# EAGLE board delayed_pulser (EAGLE 6.5.0)
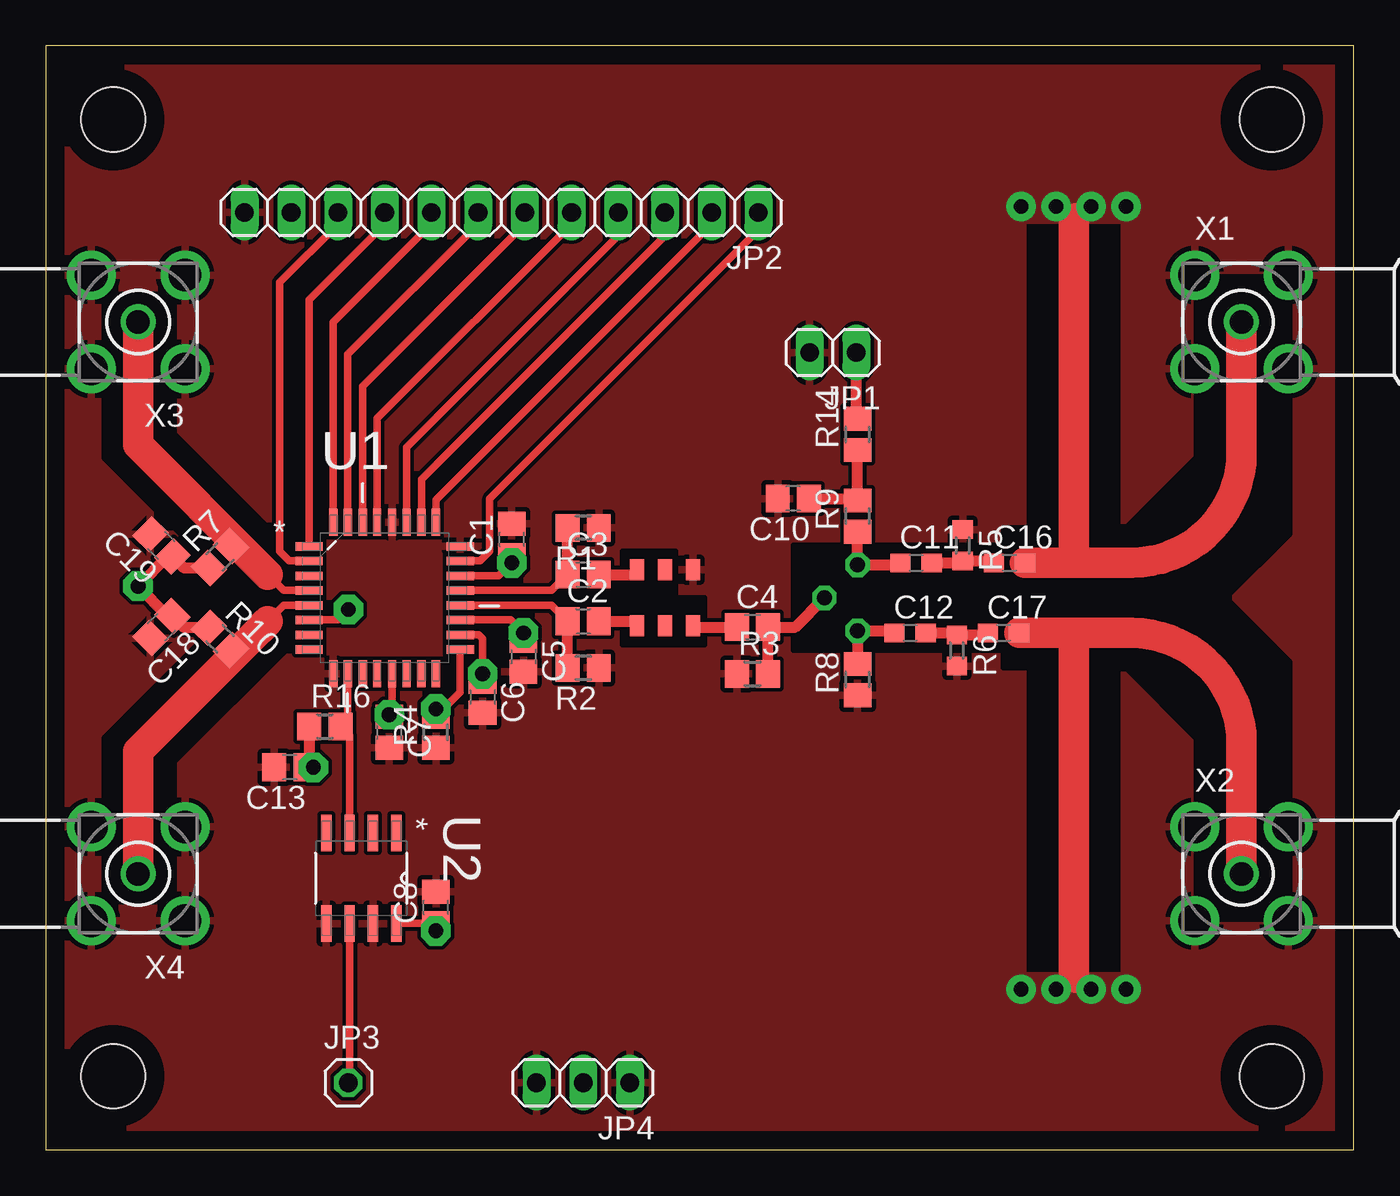
[diagram p0: board, top side]
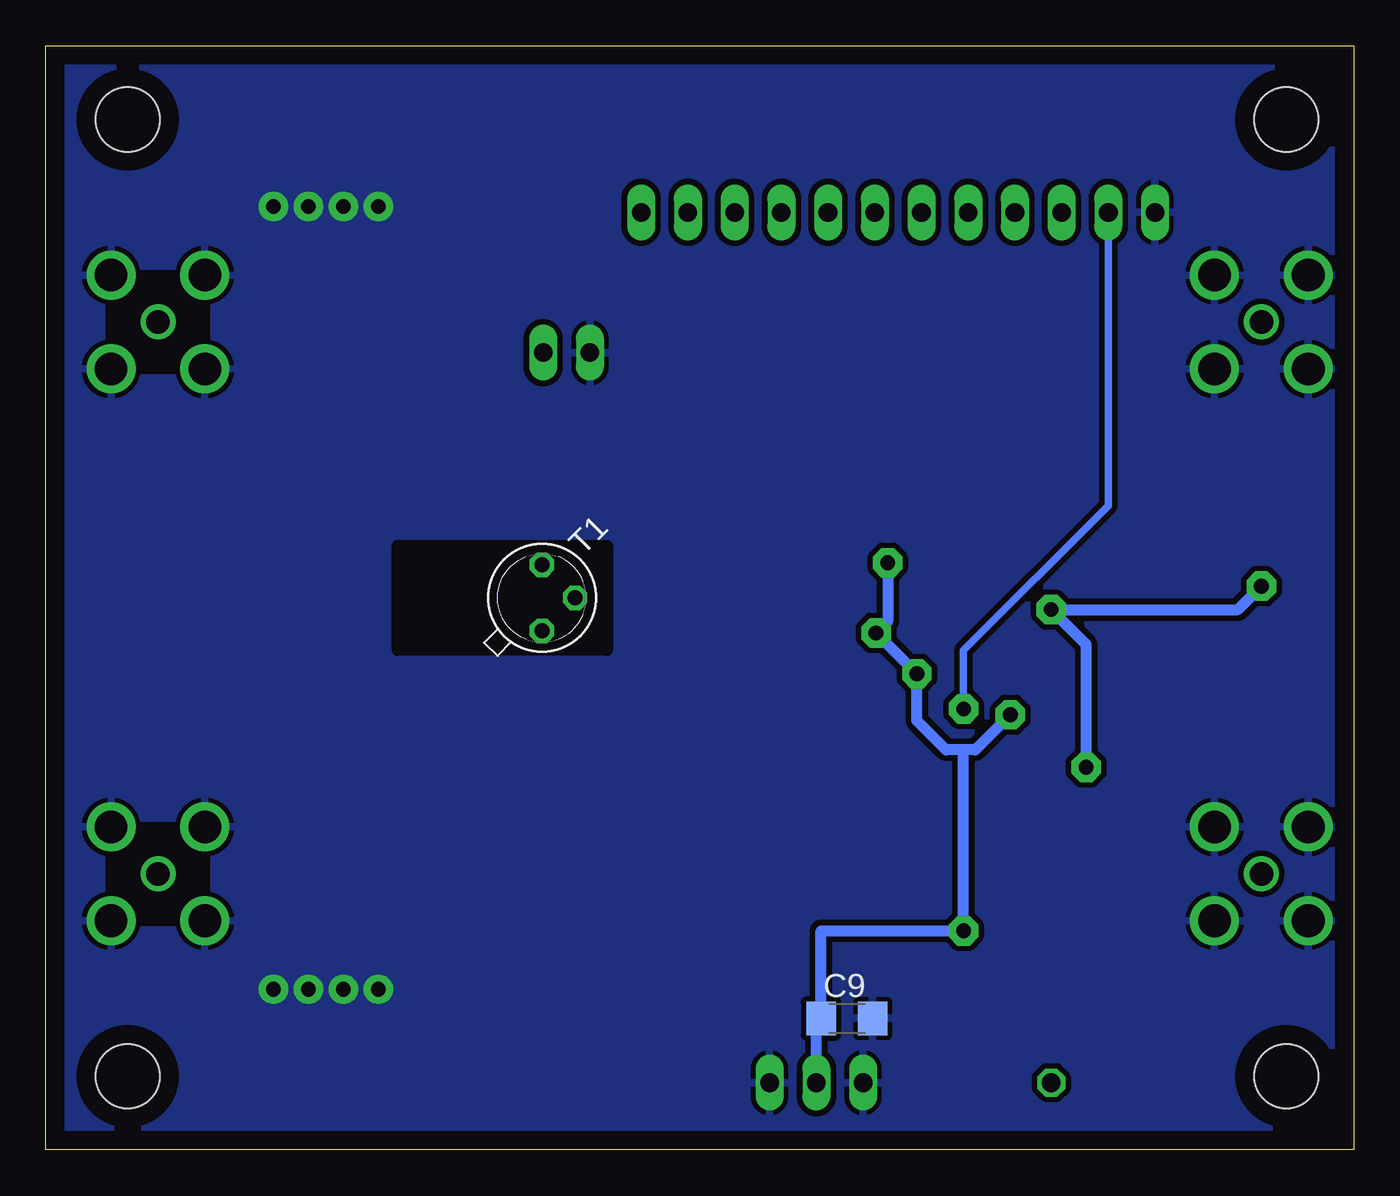
[diagram p1: board, bottom side, seen from below]

Size 71.1 x 60 mm. Coordinates in mm from the lower left corner, seen from the top.
Outline: 0,0 71.1,0 71.1,60 0,60 0,0
Copper layers (1*16): Top 0.035mm / dielectric 1.5mm / Bottom 0.035mm
Design rules "default": minimum track width 10mil, minimum drill 24mil, track to track 8mil, track to pad 8mil, pad to pad 8mil, via to via 8mil, smd to smd 8mil, copper to edge 40mil, drill to drill 8mil, minimum pad ring 10mil, minimum via ring 8mil, stop-mask expansion 4mil, vias tented up to drill 0mil, thermal gap 10mil
Holes 3.5 mm at 3.66,56 66.66,56 66.66,4 3.66,4
tRestrict: area 62.5,42.5 to 67.6,47.5; area 62.5,12.5 to 67.6,17.5; area 3.2,13.5 to 13.3,46.5; area 52.1,12.5 to 67.6,47.5; area 40.6,27.1 to 52.1,32.9; area 53.3,9.7 to 58.4,27.1; area 53.3,32.9 to 58.4,50.3; area 31.4,27.5 to 35.8,32.5
bRestrict: area 62.5,42.5 to 67.6,47.5; area 62.5,12.5 to 67.6,17.5; area 40.6,27.1 to 52,32.9

## Footprints (pad centres in the part's own frame; a part is rotated, then mirrored left to right if it is on the bottom)
C0805 = smd 1.3 x 1.5: 1 -0.85,0; 2 0.85,0
C1206 = smd 1.6 x 1.8: 1 -1.4,0; 2 1.4,0
C0603 = smd 1.1 x 1: 1 -0.85,0; 2 0.85,0
1X02 = drill 1.016 long: 1 -1.27,0; 2 1.27,0
1X12 = drill 1.016 long: 1 -13.97,0; 2 -11.43,0; 3 -8.89,0; 4 -6.35,0; 5 -3.81,0; 6 -1.27,0; 7 1.27,0; 8 3.81,0; 9 6.35,0; 10 8.89,0; 11 11.43,0; 12 13.97,0
1X01 = drill 1.016 octagon: 1 0,0
1X03 = drill 1.016 long: 1 -2.54,0; 2 0,0; 3 2.54,0
R0805 = smd 1.3 x 1.5: 1 -0.85,0; 2 0.85,0
R0603 = smd 1 x 1.1: 1 -0.85,0; 2 0.85,0
TO18 = drill 0.813 octagon: 1 -1.27,-1.27; 2 1.27,-1.27; 3 1.27,1.27
QFP80P900X900X160-32N = smd 1.473 x 0.457: 1 -4.115,2.794; 2 -4.115,2.007; 3 -4.115,1.194; 4 -4.115,0.406; 5 -4.115,-0.406; 6 -4.115,-1.194; 7 -4.115,-2.007; 8 -4.115,-2.794; 17 4.115,-2.794; 18 4.115,-2.007; 19 4.115,-1.194; 20 4.115,-0.406; 21 4.115,0.406; 22 4.115,1.194; 23 4.115,2.007; 24 4.115,2.794 | smd 0.457 x 1.473: 9 -2.794,-4.115; 10 -2.007,-4.115; 11 -1.194,-4.115; 12 -0.406,-4.115; 13 0.406,-4.115; 14 1.194,-4.115; 15 2.007,-4.115; 16 2.794,-4.115; 25 2.794,4.115; 26 2.007,4.115; 27 1.194,4.115; 28 0.406,4.115; 29 -0.406,4.115; 30 -1.194,4.115; 31 -2.007,4.115; 32 -2.794,4.115
SOIC127P600X175-8N = smd 1.981 x 0.559: 1 -2.464,1.905; 2 -2.464,0.635; 3 -2.464,-0.635; 4 -2.464,-1.905; 5 2.464,-1.905; 6 2.464,-0.635; 7 2.464,0.635; 8 2.464,1.905
T = smd 0.762 x 1.143: P$1 -1.524,1.524; P$2 1.524,1.524; P$3 1.524,-1.524; P$4 -1.524,-1.524; P$5 0,1.524; P$6 0,-1.524
BU-SMA-H = drill 1.27: 1 0,0 | drill 1.778: 2 -2.55,2.55; 3 2.55,2.55; 4 2.55,-2.55; 5 -2.55,-2.55

## Placement (x,y rotation side)
C1  [C0805]  25.33,33.17 90 top
C2  [C0805]  29.21,28.73 0 top
C3  [C0805]  29.21,31.27 0 top
C4  [C0805]  38.42,28.41 0 top
C5  [C0805]  25.97,26.82 270 top
C6  [C0805]  23.74,24.6 270 top
C7  [C0805]  18.66,22.7 270 top
C8  [C0805]  21.2,13.17 90 top
C9  [C1206]  27.55,7.14 0 bottom
C10  [C0805]  40.64,35.4 180 top
C11  8p2  [C0603]  47.31,31.91 0 top
C12  8p2  [C0603]  46.99,28.09 0 top
C13  [C0805]  13.27,20.79 180 top
C16  100p  [C0603]  52.39,31.91 0 top
C17  100p  [C0603]  52.07,28.09 0 top
C18  [C0805]  6.28,28.41 225 top
C19  [C0805]  6.28,32.86 135 top
JP1  [1X02]  42.79,43.34 180 top
JP2  [1X12]  24.77,50.95 180 top
JP3  [1X01]  16.44,3.65 0 top
JP4  [1X03]  29.21,3.65 180 top
R1  150  [R0805]  29.21,33.81 180 top
R2  150  [R0805]  29.21,26.19 180 top
R3  200  [R0805]  38.42,25.87 0 top
R4  1k  [R0805]  21.2,22.7 90 top
R5  50  [R0603]  49.85,32.86 270 top
R6  50  [R0603]  49.53,27.14 270 top
R7  50  [R0805]  9.46,32.22 45 top
R8  3k3  [R0805]  44.13,25.55 90 top
R9  3k3  [R0805]  44.13,34.45 90 top
R10  50  [R0805]  9.46,27.78 315 top
R14  10k  [R0805]  44.13,38.89 90 top
R16  50  [R0805]  15.17,23.02 0 top
T1  2N2369  [TO18]  44.13,30 45 bottom
U1  MC100EP196FAG  [QFP80P900X900X160-32N]  18.42,30 0 top
U2  MC100EPT22DG  [SOIC127P600X175-8N]  17.15,14.76 270 top
U$1  JA4220  [T]  33.66,30 180 top
X1  BU-SMA-H  [BU-SMA-H]  65.01,45 0 top
X2  BU-SMA-H  [BU-SMA-H]  65.01,15 0 top
X3  BU-SMA-H  [BU-SMA-H]  5.01,45 180 top
X4  BU-SMA-H  [BU-SMA-H]  5.01,15 180 top

## Library data of the parts
C1-C13 C16-C19 R1-R10 R14 R16 = resistor
JP1-JP4 = pinhead
T1 = transistor-neu-to92
U1 = MC100EP196; MPN: MC100EP196FAG; OC_FARNELL: 1703312; OC_NEWARK: 88H4711; PACKAGE: LQFP-32; SUPPLIER: ON SEMICONDUCTOR
U2 = MC100EPT22; MPN: MC100EPT22DG; OC_FARNELL: 1607867; OC_NEWARK: 45J0924; PACKAGE: SOIC-8; SUPPLIER: Onsemiconductor
U$1 = \cct
X1-X4 = con-coax; OC_FARNELL: unknown; OC_NEWARK: unknown

## Nets
+3V3: C1.1 C5.1 C6.1 C7.1 C8.1 C9.1 JP4.2 U1.13 U1.18 U1.19 U1.22 U2.8
GND: C1.2 C5.2 C6.2 C7.2 C8.2 C9.2 C10.2 C13.2 C16.2 C17.2 C18.2 C19.2 JP1.2 JP2.12 JP4.1 JP4.3 R1.1 R2.1 R3.1 R4.1 R5.1 R6.2 R8.1 U1.9 U1.24 U1.28 U2.5 U2.7 U$1.P$4 X1.1 X1.2 X1.3 X1.4 X1.5 X2.1 X2.2 X2.3 X2.4 X2.5 X3.2 X3.3 X3.4 X3.5 X4.2 X4.3 X4.4 X4.5
N$1: JP2.1 U1.23
N$2: C3.1 R1.2 U1.21
N$3: C2.1 R2.2 U1.20
N$4: C2.2 U$1.P$2
N$5: C3.2 U$1.P$3
N$6: C4.1 U$1.P$1
N$7: C4.2 R3.2 T1.2
N$8: JP2.2 U1.25
N$9: JP2.11 R4.2 U1.17
N$10: JP2.3 U1.26
N$11: C11.1 R9.1 T1.3
N$12: C12.1 R8.2 T1.1
N$14: JP2.4 U1.27
N$15: JP2.5 U1.29
N$16: JP2.6 U1.30
N$17: JP2.7 U1.31
N$18: JP2.8 U1.32
N$19: C10.1 R9.2 R14.1
N$20: JP2.9 U1.1
N$21: JP2.10 U1.2
N$22: JP1.1 R14.2
N$26: C11.2 C16.1 R5.2
N$27: C12.2 C17.1 R6.1
N$30: R10.2 U1.5 X4.1
N$31: R7.2 U1.4 X3.1
N$32: R16.2 U1.10 U2.3
N$34: JP3.1 U2.6
VBB: C13.1 C18.1 C19.1 R7.1 R10.1 R16.1 U1.6

## Tracks (layer width: path | path; a pad name or v marks a point on that pad's centre or on a via)
+3V3  (via drill 0.8 pad 1.6)
  Top 0.406: U1.13 18.82,23.81 v18.66,23.65 C7.1 | U1.18 23.53,27.99 23.74,27.78 v23.74,25.87 C6.1 | U1.19 25.25,28.81 v25.97,28.09 C5.1 | C1.1 v25.33,31.91 24.62,31.19 U1.22 | U2.8 19.05,12.32 C8.1 v21.2,11.9
  Bottom 0.61: v25.33,31.91 25.33,28.73 v25.97,28.09 v23.74,25.87 23.74,23.33 22.16,21.74 21.2,21.74 | v18.66,23.65 20.57,21.74 21.2,21.74 | JP4.2 29.21,6.88 C9.1 28.95,11.9 v21.2,11.9 21.2,21.74
GND  (via drill 0.8 pad 1.6)
  Top 0.406: C16.2 55.56,31.91 55.56,32.54 55.88,32.54 55.88,32.82 | C17.2 55.56,28.09 55.56,27.46 55.88,27.46 55.88,27.18 | v56.83,51.27 55.88,51.27 55.88,50.32 | v56.83,8.73 55.88,8.73 55.88,9.68
  Top 1.67: C16.2 59.01,31.91 arc90 65.01,37.91 X1.1 | C17.2 59.01,28.09 arc-90 65.01,22.09 X2.1 | 55.88,9.68 55.88,27.18 | 55.88,50.32 55.88,32.82
  other vias: 53.02,51.27 54.93,51.27 58.74,51.27 53.02,8.73 54.93,8.73 58.74,8.73
  pour Top: -0.63,-0.8 71.75,-0.8 71.75,60.4 -0.63,60.4
  pour Bottom (isolate 0.305): -0.34,-1 71.66,-1 71.66,61 -0.34,61
N$1
  Top 0.406: U1.23 23.6,32.01 24.13,32.54 24.13,35.4 38.74,50 JP2.1
N$2
  Top 0.406: U1.21 27.5,30.41 C3.1
  Top 0.61: C3.1 R1.2
N$3
  Top 0.406: U1.20 27.5,29.59 C2.1
  Top 0.61: R2.2 C2.1
N$4
  Top 0.61: C2.2 31.88,28.73 U$1.P$2
N$5
  Top 0.61: C3.2 31.88,31.27 U$1.P$3
N$6
  Top 0.406: 35.24,28.41 U$1.P$1
  Top 0.61: 35.24,28.41 C4.1
N$7
  Top 0.61: T1.2 40.75,28.41 C4.2 R3.2
N$8
  Top 0.406: U1.25 21.21,35.33 36.19,50.32 JP2.2
N$9  (via drill 0.8 pad 1.6)
  Top 0.406: U1.17 22.53,24.88 R4.2 v21.2,23.97
  Bottom 0.406: JP2.11 13.34,35.01 21.2,27.14 v21.2,23.97
N$10
  Top 0.406: U1.26 20.42,36.45 33.65,49.69 JP2.3
N$11
  Top 0.61: R9.1 T1.3 46.46,31.8 C11.1
N$12
  Top 0.61: R8.2 T1.1 46.14,28.2 C12.1
N$14
  Top 0.406: U1.27 19.61,38.18 31.12,49.69 JP2.4
N$15
  Top 0.406: U1.29 18.01,39.75 28.57,50.32 JP2.5
N$16
  Top 0.406: U1.30 17.22,41.51 26.03,50.32 JP2.6
N$17
  Top 0.406: JP2.7 23.49,50.32 16.41,43.23 U1.31
N$18
  Top 0.406: U1.32 15.62,44.99 20.95,50.32 JP2.8
N$19
  Top 0.61: C10.1 44.13,35.4 R9.2 R14.1
N$20
  Top 0.406: U1.1 14.3,46.2 18.42,50.32 JP2.9
N$21
  Top 0.406: U1.2 13.23,32.01 12.7,32.54 12.7,47.14 15.87,50.32 JP2.10
N$22
  Top 0.61: R14.2 44.06,39.74 JP1.1
N$26
  Top 0.61: C11.2 49.85,31.91 R5.2 51.54,32.01 C16.1
N$27
  Top 0.61: C12.2 49.53,28.09 R6.1 51.22,27.99 C17.1
N$30
  Top 0.406: U1.5 12.93,29.59 12.06,28.73
  Top 0.61: R10.2 10.51,27.18 11.55,28.22
  Top 1.67: X4.1 5.01,21.68 11.55,28.22 12.06,28.73
N$31
  Top 0.406: U1.4 12.93,30.41 12.06,31.27
  Top 0.61: R7.2 10.51,32.82 11.71,31.62
  Top 1.67: X3.1 5.01,38.33 11.71,31.62 12.06,31.27
N$32
  Top 0.406: U1.10 16.41,23.4 R16.2 16.51,22.52 U2.3
N$34
  Top 0.406: U2.6 16.51,3.65 JP3.1
VBB  (via drill 0.8 pad 1.6)
  Top 0.406: U1.6 15.88,28.81 v16.44,29.36
  Top 0.61: R10.1 7.52,28.38 C18.1 6.63,29.01 v5.01,30.64 6.63,32.26 C19.1 7.52,31.62 R7.1 | R16.1 14.32,21.01 | 14.32,21.01 v14.53,20.79 | 14.32,21.01 14.32,21 C13.1
  Bottom 0.61: v5.01,30.64 6.28,29.36 v16.44,29.36 14.53,27.46 v14.53,20.79

## Text on the board
bDocu: (C) Mathias Helsen 2014